# EAGLE board Sensor_ESP32_1.0 (EAGLE 9.6.2)
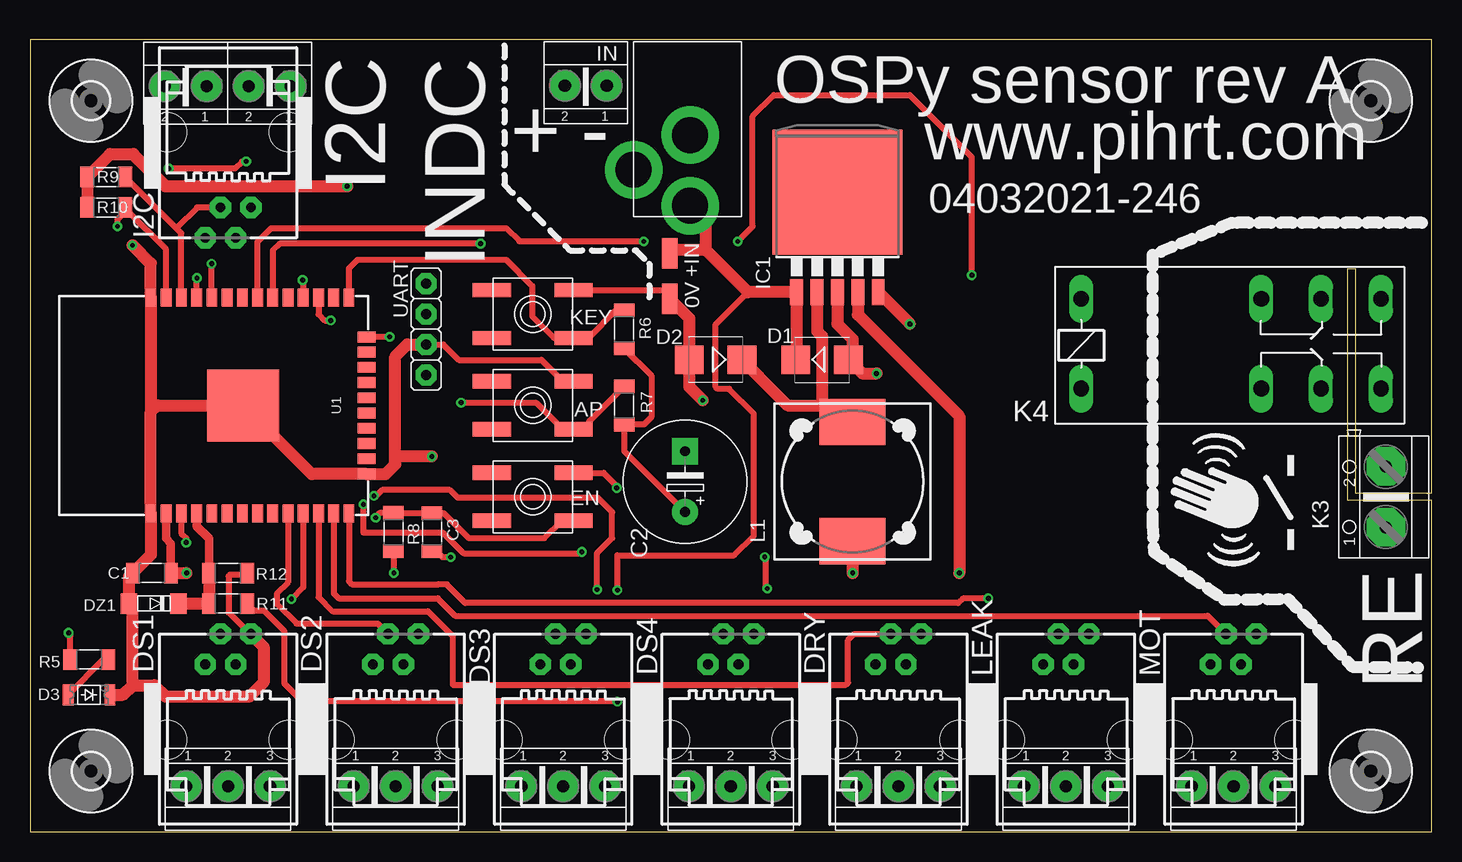
[diagram p0: board, top side]
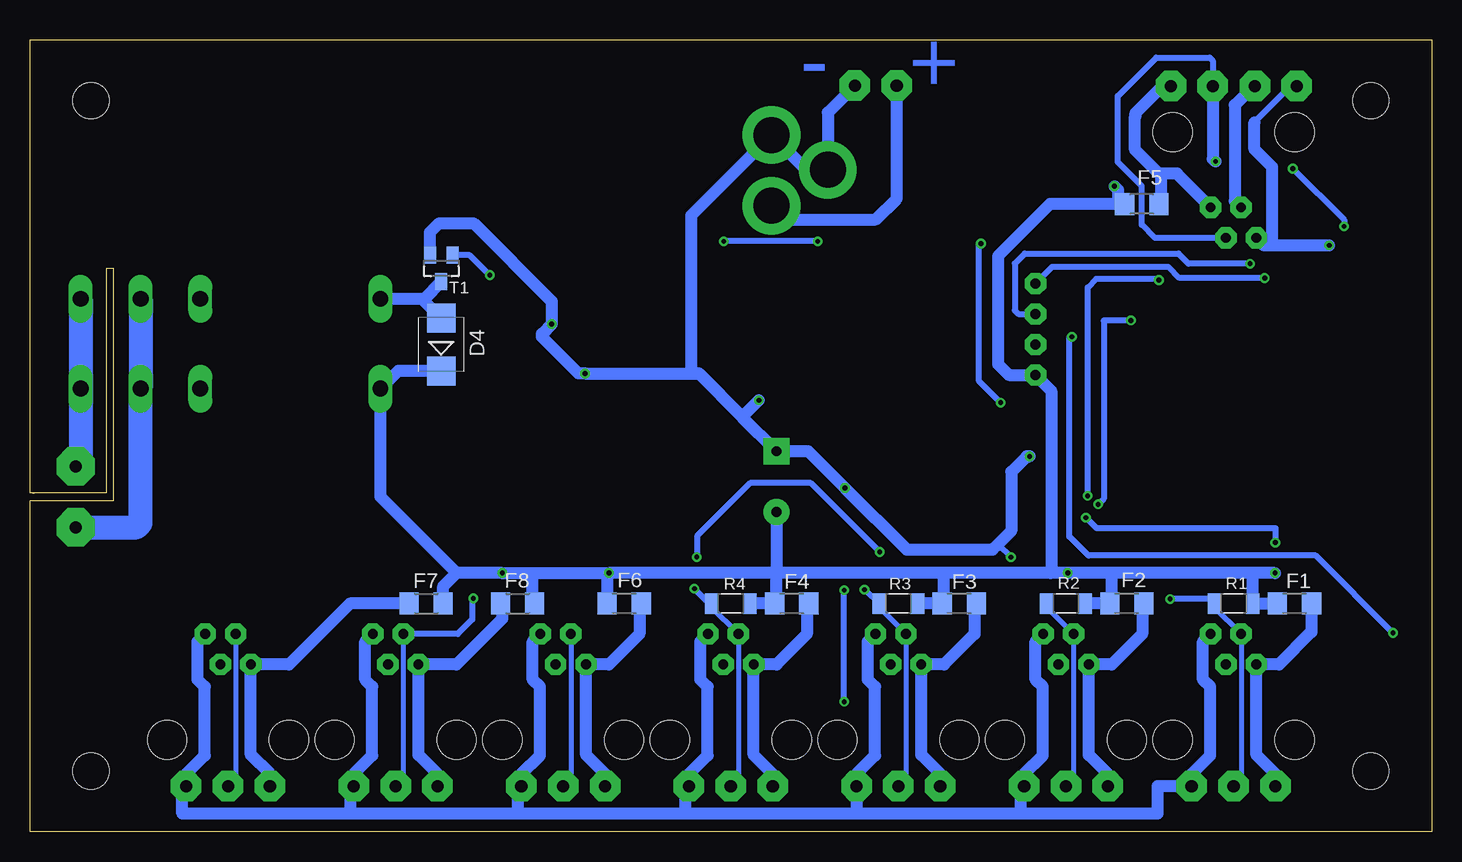
[diagram p1: board, bottom side, seen from below]

Size 116.84 x 66.04 mm. Coordinates in mm from the lower left corner, seen from the top.
Outline: 116.48,28.23 116.66,28.24
Outline: 0,0 116.84,0 116.84,27.62 109.86,27.62 109.86,46.99 110.49,46.99 110.49,28.26 116.84,28.26 116.84,66.04 0,66.04 0,0
Copper layers (1*16): Top 0.035mm / dielectric 1.5mm / Bottom 0.035mm
Design rules "default": minimum track width 6mil, minimum drill 0.35mm, track to track 6mil, track to pad 6mil, pad to pad 6mil, via to via 6mil, smd to smd 6mil, copper to edge 40mil, drill to drill 6mil, minimum pad ring 10mil, minimum via ring 8mil, stop-mask expansion 4mil, vias tented up to drill 0mil, thermal gap 10mil

## Footprints (pad centres in the part's own frame; a part is rotated, then mirrored left to right if it is on the bottom)
SMD1,27-2,54 = smd 1.27 x 2.54: 1 0,0
PJ-102A = drill 3 pad 4.8: RING 0.1,-3.39; RING_SW -4.6,-6.29; TIP 0.1,-9.29
EVQ-Q2 = smd 3.2 x 1.2: A -3.4,-2; A' 3.4,-2; B -3.4,2; B' 3.4,2
1206 = smd 1.143 x 1.702: 1 -1.587,0; 2 1.587,0
C-EL_5 = drill 0.813 pad 2.184: C+ -2.54,0 | drill 0.813 pad 2.184 square: C- 2.54,0
SMB = smd 2.4 x 2.4: A 2.2,0; C -2.2,0
P1206 = smd 0.914 x 1.778: A -1.905,0; K 1.587,0
WEBP_6_1 = drill 0.813 pad 1.778 octagon: 1 -1.905,6.35; 2 -0.635,8.89; 3 0.635,6.35; 4 1.905,8.89 | hole 3.251: -5.08,0.064; 5.08,0.064
ARK550/3 = drill 1.016 pad 2.54 octagon: 1 -3.493,0; 2 0,0; 3 3.493,0
SOD-80 = smd 1.397 x 1.702: A 1.905,0; K -2.223,0
R1206 = smd 1.6 x 1.803: 1 -1.422,0; 2 1.422,0
3,0 = hole 3: 0,0
TO263-5 = smd 1.067 x 2.159: 1 -3.404,-5.791; 2 -1.702,-5.791; 3 0,-5.791; 4 1.702,-5.791; 5 3.404,-5.791 | smd 10.8 x 10.41: 6 0,2.54
ARK550/2 = drill 1.016 pad 2.54 octagon: 1 0,0; 2 3.493,0
ARK500/2 = drill 1 pad 3.2 octagon: 1 -2.54,0; 2 2.54,0
G2R2 = drill 1.321 long: 1 -2.54,-3.683; 2 -2.54,3.81; O1 12.471,3.81; O2 12.471,-3.683; P1 17.45,3.81; P2 17.45,-3.683; S1 22.454,3.81; S2 22.454,-3.683
DR125 = smd 3.85 x 5.5: 1 -4.975,0; 2 4.975,0
SOT23 = smd 1 x 1.4: 1 -0.95,-1.1; 2 0.95,-1.1; 3 0,1.1
ESP-WROOM-32 = smd 0.9 x 1.5: 1 7.7,9; 2 6.43,9; 3 5.16,9; 4 3.89,9; 5 2.62,9; 6 1.35,9; 7 0.08,9; 8 -1.19,9; 9 -2.46,9; 10 -3.73,9; 11 -5,9; 12 -6.27,9; 13 -7.54,9; 14 -8.81,9; 25 -8.81,-9; 26 -7.54,-9; 27 -6.27,-9; 28 -5,-9; 29 -3.73,-9; 30 -2.46,-9; 31 -1.19,-9; 32 0.08,-9; 33 1.35,-9; 34 2.62,-9; 35 3.89,-9; 36 5.16,-9; 37 6.43,-9; 38 7.7,-9 | smd 1.5 x 0.9: 15 -10.3,5.715; 16 -10.3,4.445; 17 -10.3,3.175; 18 -10.3,1.905; 19 -10.3,0.635; 20 -10.3,-0.635; 21 -10.3,-1.905; 22 -10.3,-3.175; 23 -10.3,-4.445; 24 -10.3,-5.715 | smd 6 x 6: GND 0,0
S1G4_JUM = drill 0.813 pad 1.778 octagon: 1 -3.81,0; 2 -1.27,0; 3 1.27,0; 4 3.81,0

## Placement (x,y rotation side)
0V  [SMD1,27-2,54]  53.34,44.45 0 top
+DCIN  2.1MMJACKTHM  [PJ-102A]  54.93,61.5 0 top
+IN  [SMD1,27-2,54]  53.34,48.26 0 top
AP  [EVQ-Q2]  41.91,35.56 180 top
C1  100n  [1206]  10.16,21.59 0 top
C2  1000uF/10V  [C-EL_5]  54.61,29.21 90 top
C3  100n  [1206]  33.51,25 90 top
D1  SK210  [SMB]  66.04,39.37 0 top
D2  SK210  [SMB]  57.15,39.37 180 top
D3  MODE  [P1206]  5.08,11.43 0 top
D4  SK210  [SMB]  82.55,40.64 90 bottom
DRY  [WEBP_6_1]  72.39,7.62 0 top
DRYS  [ARK550/3]  72.39,3.81 0 top
DS1  [WEBP_6_1]  16.51,7.62 0 top
DS1S  [ARK550/3]  16.51,3.81 0 top
DS2  [WEBP_6_1]  30.48,7.62 0 top
DS2S  [ARK550/3]  30.48,3.81 0 top
DS3  [WEBP_6_1]  44.45,7.62 0 top
DS3S  [ARK550/3]  44.45,3.81 0 top
DS4  [WEBP_6_1]  58.42,7.62 0 top
DS4S  [ARK550/3]  58.42,3.81 0 top
DZ1  BZV55-C3V6.115  [SOD-80]  10.16,19.05 180 top
EN  [EVQ-Q2]  41.91,27.94 180 top
F1  20 mA  [R1206]  11.43,19.05 0 bottom
F2  20 mA  [R1206]  25.4,19.05 0 bottom
F3  20 mA  [R1206]  39.37,19.05 0 bottom
F4  20 mA  [R1206]  53.34,19.05 0 bottom
F5  200 mA  [R1206]  24.16,52.35 0 bottom
F6  20 mA  [R1206]  67.31,19.05 0 bottom
F7  20 mA  [R1206]  83.82,19.05 180 bottom
F8  20 mA  [R1206]  76.2,19.05 180 bottom
H1  [3,0]  5.08,5.08 0 top
H2  [3,0]  5.08,60.96 0 top
H3  [3,0]  111.76,60.96 0 top
H4  [3,0]  111.76,5.08 0 top
I2C  [WEBP_6_1]  16.51,58.42 180 top
IC1  LM2576S-3.3/NOPB  [TO263-5]  67.31,50.8 0 top
IN  [ARK550/2]  48.08,62.23 180 top
K1  [ARK550/2]  21.73,62.19 180 top
K2  [ARK550/2]  14.73,62.19 180 top
K3  RE OUT  [ARK500/2]  113.03,27.94 90 top
K4  RM84-2012-35-1003  [G2R2]  90.17,40.64 0 top
KEY  [EVQ-Q2]  41.91,43.18 180 top
L1  HPI1260-101 100uH  [DR125]  68.58,29.21 90 top
LEAK  [WEBP_6_1]  86.36,7.62 0 top
LEAKS  [ARK550/3]  86.36,3.81 0 top
MOT  [WEBP_6_1]  100.33,7.62 0 top
MOTS  [ARK550/3]  100.33,3.81 0 top
R1  4k7  [1206]  16.51,19.05 0 bottom
R2  4k7  [1206]  30.48,19.05 0 bottom
R3  4k7  [1206]  44.45,19.05 0 bottom
R4  4k7  [1206]  58.42,19.05 0 bottom
R5  330  [1206]  4.94,14.37 180 top
R6  10k  [1206]  49.53,41.91 90 top
R7  10k  [1206]  49.53,35.56 90 top
R8  10k  [1206]  30.3,25 270 top
R9  4k7  [1206]  6.35,54.61 0 top
R10  4k7  [1206]  6.35,52.07 0 top
R11  100k  [1206]  16.51,19.05 180 top
R12  10k  [1206]  16.51,21.59 180 top
T1  2N7002E  [SOT23]  82.55,46.99 180 bottom
U1  ESP-WROOM-32  [ESP-WROOM-32]  17.78,35.56 180 top
U$1  [GESTURESENSE_NOTEXT]  102.55,21.91 90 top
UART  [S1G4_JUM]  33.02,41.91 90 top

## Library data of the parts
0V +IN = wirepad
+DCIN AP EN F1-F8 KEY = adafruit
C1-C3 D3 DZ1 R1-R12 = #PaJa_31
D1 D2 D4 = diode
DRY DRYS DS1 DS1S DS2 DS2S DS3 DS3S DS4 DS4S I2C IN K1-K3 LEAK LEAKS MOT MOTS UART = #PaJa_konektory
H1-H4 = holes
IC1 = v-reg-3
K4 = relay; MF: OMRON COMPONENTS USA; MPN: G2R-2-DC6; OC_FARNELL: unknown; OC_NEWARK: 89C5317
L1 = inductors; SPICEPREFIX: L
T1 = nxp_60
U1 = esp32
U$1 = SparkFun-Aesthetics

## Nets
+3,3V: C1.2 C2.C+ D4.C F1.1 F2.1 F3.1 F4.1 F5.1 F6.1 F7.1 F8.1 IC1.4 K4.1 L1.1 R1.2 R2.2 R3.2 R4.2 R6.1 R7.1 R8.2 R9.1 R10.1 U1.2 UART.1
AD: DZ1.K R11.2 R12.2 U1.4
BOOT: KEY.B R6.2 U1.25
DRYCON: DRY.2 DRYS.2 U1.12
DS1: DS1.2 DS1S.2 R1.1 U1.11
DS2: DS2.2 DS2S.2 R2.1 U1.10
DS3: DS3.2 DS3S.2 R3.1 U1.28
DS4: DS4.2 DS4S.2 R4.1 U1.27
EN: C3.2 EN.B R8.1 U1.3
GND: 0V.1 +DCIN.RING +DCIN.RING_SW AP.A C1.1 C2.C- C3.1 D1.A D2.A D3.K DRY.4 DRYS.3 DS1.4 DS1S.3 DS2.4 DS2S.3 DS3.4 DS3S.3 DS4.4 DS4S.3 DZ1.A EN.A I2C.4 IC1.3 IC1.5 IN.1 K2.2 KEY.A LEAK.4 LEAKS.3 MOT.4 MOTS.3 R12.1 T1.2 U1.1 U1.15 U1.38 U1.GND UART.2
IN: +DCIN.TIP +IN.1 D1.C IC1.1 IN.2 R11.1
LEAK: LEAK.2 LEAKS.2 U1.14
MOTION: MOT.2 MOTS.2 U1.13
N$1: DS1.1 DS1S.1 F1.2
N$2: D2.C IC1.2 L1.2
N$3: DS2.1 DS2S.1 F2.2
N$4: F8.2 LEAK.1 LEAKS.1
N$5: DS3.1 DS3S.1 F3.2
N$6: DS4.1 DS4S.1 F4.2
N$7: F5.2 I2C.1 K1.1
N$8: D4.A K4.2 T1.3
N$9: R5.2 U1.24
N$10: K3.2 K4.S1 K4.S2
N$11: K3.1 K4.P1 K4.P2
N$12: DRY.1 DRYS.1 F6.2
N$13: F7.2 MOT.1 MOTS.1
N$18: D3.A R5.1
RELE: T1.1 U1.31
RXD: U1.35 UART.4
SCL: I2C.3 K2.1 R9.2 U1.36
SDA: I2C.2 K1.2 R10.2 U1.37
TXD: U1.34 UART.3
WIFIAP: AP.B R7.2 U1.30

## Tracks (layer width: path | path; a pad name or v marks a point on that pad's centre or on a via)
+3,3V  (via drill 0.4)
  Top 0.5: 26.44,53.84 v26.44,53.84 | R8.2 30.3,21.78 30.33,21.76 v30.33,21.59 | C2.C+ 49.53,31.75 R7.1 51.2,33.97 51.81,34.58 51.81,38.05 R6.1
  Top 0.7: U1.2 11.35,24.46 11.75,24.07 C1.2
  Top 1: R10.1 R9.1 6.68,56.52 8.61,56.52 11.3,53.84 26.44,53.84 | C1.2 13.01,21.59 13.03,21.57 v13.05,21.59 | L1.1 v68.58,21.59 | IC1.4 69.01,43.12 77.47,34.66 v77.47,21.59
  Bottom 1: F1.1 R1.2 14.92,21.59 | R2.2 F2.1 26.67,19.2 26.67,21.59 | R3.2 F3.1 40.64,19.2 40.64,21.59 | R4.2 F4.1 54.61,19.2 54.61,21.59 | 14.92,21.59 26.67,21.59 | 26.67,21.59 v30.33,21.59 31.76,21.59 | 31.76,21.59 40.64,21.59 | 40.64,21.59 54.61,21.59 | 54.61,21.59 v68.58,21.59 | v68.58,21.59 68.73,21.44 F6.1 | F7.1 82.4,20.47 81.28,21.59 | 81.28,21.59 v77.47,21.59 74.93,21.59 | 74.93,21.59 v68.58,21.59 | F8.1 74.93,19.2 74.93,21.59 | D4.C 86.15,38.44 K4.1 87.63,27.94 81.28,21.59 | v26.44,53.84 26.13,53.54 26.13,52.9 F5.1 31.81,52.35 36.15,48.01 36.15,39.01 35.24,38.1 UART.1 31.7,36.78 31.7,21.66 31.76,21.59 | v13.05,21.59 14.92,21.59 | C2.C+ 54.61,21.59
AD
  Top 0.7: U1.4 13.91,26.54 13.91,25.48 14.92,24.47 R12.2
  Top 1: DZ1.K R11.2 R12.2
BOOT
  Top 0.5: R6.2 48.87,43.5 46.55,41.18 KEY.B 43.67,41.18 41.87,42.98 41.87,45.53 39.7,47.7 27.29,47.7 26.59,47 U1.25
DRYCON
  Top 0.5: U1.12 24.05,19.58 25.23,18.41 33.17,18.41 35.24,16.34 35.24,12.27 68.02,12.27 68.2,12.45 68.2,16.01 68.7,16.51 DRY.2
  Bottom 0.4: DRY.2 71.75,4.45 DRYS.2
DS1  (via drill 0.4)
  Top 0.5: U1.11 22.78,20.41 v21.79,19.42
  Bottom 0.4: DS1S.2 15.88,4.45 DS1.2 18.1,18.73 R1.1
  Bottom 0.5: v21.79,19.42 21.75,19.46 18.51,19.46 R1.1
DS2
  Top 0.5: U1.10 21.51,20.81 20.57,19.88 20.57,19.01 22.21,17.37 28.99,17.37 DS2.2
  Bottom 0.4: DS2S.2 29.84,4.45 DS2.2 32.07,18.73 R2.1
DS3  (via drill 0.4)
  Top 0.5: v47.28,20.2 47.28,23.27 48.52,24.5 48.52,26.68 47.35,27.85 35.67,27.85 35.01,28.5 29.36,28.5 28.78,27.92 v28.67,28.02 | v28.67,28.02 | v22.73,46.02 22.78,45.97 U1.28
  Bottom 0.4: DS3S.2 43.81,4.45 DS3.2 46.04,18.73 R3.1
  Bottom 0.5: R3.1 47.19,20.2 v47.28,20.2 | v28.67,28.02 28.67,45.4 27.95,46.12 22.8,46.12 22.8,46.09 v22.73,46.02
DS4  (via drill 0.4)
  Top 0.5: U1.27 24.05,43.16 24.57,42.65 v25.06,42.65 | v27.79,27.32 27.79,24.97 34.41,24.97 36.14,23.24 46.01,23.24 v46.01,23.35 | v61.26,22.92 61.31,22.86 61.31,20.39 61.43,20.28 v61.46,20.28
  Bottom 0.4: DS4S.2 57.78,4.45 DS4.2 60.01,18.73 R4.1
  Bottom 0.5: v25.06,42.65 27.3,42.65 27.34,42.6 27.34,27.77 v27.79,27.32 | v46.01,23.35 51.75,29.09 56.8,29.09 61.23,24.67 61.23,22.95 v61.26,22.92 | v61.46,20.28 60.23,19.05 R4.1
EN  (via drill 0.4)
  Top 0.5: v28.82,26.2 28.82,26.28 29.13,26.59 R8.1 C3.2 34.48,26.59 36.57,24.49 42.89,24.49 44.34,25.94 EN.B | v13.02,24.13 13.02,24.51 12.62,24.91 U1.3
  Bottom 0.5: v28.82,26.2 27.94,25.33 13.02,25.33 v13.02,24.13
GND  (via drill 0.4)
  Top 0.5: R12.1 17.95,21.44 16.67,21.44 16.55,21.32 16.55,18.29 18.34,16.51 DS1.4 | KEY.A 53.24,45.18 53.33,45.27 53.34,45.25 0V.1 | UART.2 34.46,40.64 35.74,39.36 42.63,39.36 44.43,37.56 AP.A | EN.A 47.81,29.94 48.9,28.85 v48.9,28.69 | C3.1 33.95,23.41 34.41,22.95 34.38,22.91 v35.07,22.91
  Top 1: D3.K 7.74,11.43 8.54,12.23 | 8.54,12.23 8.54,18.76 DZ1.A 8.26,21.27 C1.1 10.08,23.1 U1.1 10.08,35.03 | 10.08,35.03 10.61,35.56 U1.GND 23.5,29.84 U1.15 29.63,29.84 30.44,30.65 30.44,31.44 | 10.08,35.03 U1.38 10.08,47.41 8.59,48.9 v8.54,48.9 | 8.54,12.23 10.36,12.23 11.29,11.3 18.3,11.3 19.52,12.51 19.52,15.37 18.38,16.51 18.34,16.51 | IC1.3 67.31,42.36 68.58,41.09 68.58,39.71 D1.A 69.38,38.23 v70.57,38.23 | IC1.5 73.35,42.37 v73.35,42.35 | v56.08,35.99 54.95,37.12 D2.A 54.95,42.84 0V.1 | v56.08,35.99 | 30.44,31.44 30.44,39.62 31.46,40.64 UART.2 | v33.5,31.31 30.56,31.31 30.44,31.44
  Bottom 0.5: K2.2 11.77,62.19 14.78,59.18 | v35.07,22.91 | 36.15,23.99 v35.07,22.91
  Bottom 1: DS1.4 19.05,15.88 19.05,12.7 18.45,12.1 18.45,6.38 20,4.83 DS1S.3 22.86,3.81 22.86,1.52 34.29,1.52 | DS2.4 33.02,15.88 33.02,12.7 32.42,12.1 32.42,6.38 33.97,4.83 DS2S.3 34.29,3.49 34.29,1.52 | DS3.4 46.99,15.88 46.99,12.7 46.39,12.1 46.39,6.38 47.94,4.83 DS3S.3 47.94,1.83 48.26,1.52 | DS4.4 60.96,15.88 60.96,12.7 60.36,12.1 60.36,6.38 61.91,4.83 DS4S.3 62.23,3.49 62.23,1.52 | DRY.4 74.93,15.88 74.93,12.7 74.33,12.1 74.33,6.38 75.88,4.83 DRYS.3 76.2,3.49 76.2,1.52 | LEAK.4 88.9,15.88 88.9,12.7 88.3,12.1 88.3,6.38 89.85,4.83 LEAKS.3 90.17,3.49 90.17,1.52 | MOT.4 102.87,15.88 102.87,12.7 102.27,12.1 102.27,6.38 103.82,4.83 MOTS.3 104.14,3.49 104.14,1.52 90.17,1.52 | 34.29,1.52 48.26,1.52 | 48.26,1.52 62.23,1.52 | 62.23,1.52 76.2,1.52 | 76.2,1.52 90.17,1.52 | 14.78,59.18 14.78,56.91 13.32,55.45 13.32,49.02 13.2,48.9 | v8.54,48.9 13.2,48.9 | 13.2,48.9 13.98,48.9 I2C.4 | IN.1 50.33,59.98 +DCIN.RING_SW 52.13,55.21 +DCIN.RING 61.71,51.42 61.71,38.23 | 61.71,38.23 v70.57,38.23 71.11,38.23 74.17,41.28 74.17,41.53 v73.35,42.35 73.35,44.24 79.88,50.76 82.74,50.76 83.5,50 T1.2 | 61.71,38.23 61.09,38.23 57.47,34.61 | 57.47,34.61 C2.C- 51.97,31.75 v48.9,28.69 43.75,23.54 36.6,23.54 36.15,23.99 35.03,25.11 35.03,30.03 33.75,31.31 v33.5,31.31 | v56.08,35.99 57.47,34.61 | 57.47,34.61
IN  (via drill 0.4)
  Top 0.5: R11.1 18.67,18.48 18.67,18.47 19.47,18.47 21.19,16.75 21.19,12.38 22.66,10.91 48.89,10.91 48.9,10.93 v48.97,10.86 | v48.97,20.16 48.97,23.06 58.7,23.06 60.34,24.69 60.34,34.87 58.27,36.94 57.32,36.94 57.16,37.1 57.16,42.32 59.84,45.01
  Top 1: D1.C 63.91,39.44 IC1.1 59.84,45.01 56.3,48.55 | 56.3,48.55 56.3,50.94 +DCIN.TIP | +IN.1 53.63,48.55 56.3,48.55
  Bottom 0.5: v48.97,10.86 v48.97,20.16 | v48.97,20.16 | v48.97,20.16
  Bottom 1: +DCIN.TIP 53.88,51.06 46.34,51.06 44.59,52.81 IN.2
LEAK  (via drill 0.4)
  Top 0.5: U1.14 26.59,20.89 26.83,20.66 34.05,20.66 34.05,20.65 34.73,20.65 36.29,19.09 77.37,19.09 77.75,19.47 v79.88,19.47 v79.89,19.47
  Bottom 0.4: LEAK.2 85.72,4.45 LEAKS.2
  Bottom 0.5: v79.89,19.47 79.97,19.39 79.97,17.72 81.18,16.5 LEAK.2
MOTION
  Top 0.5: U1.13 25.32,19.88 25.71,19.49 33.99,19.49 35.45,18.02 98.18,18.02 MOT.2
  Bottom 0.4: MOT.2 99.69,4.45 MOTS.2
N$1
  Bottom 1: DS1S.1 13.02,4.83 14.61,6.42 DS1.1 12.7,13.97 10.01,16.66 F1.2
N$2
  Top 1: IC1.2 65.61,41.74 66.04,41.31 66.04,35.56 | 66.04,35.56 67.42,34.19 L1.2 | D2.C 60.7,38.02 63.16,35.56 66.04,35.56
N$3
  Bottom 1: DS2S.1 26.99,4.83 28.57,6.42 DS2.1 26.67,13.97 24.13,16.51 24.13,18.9 F2.2
N$4
  Bottom 1: LEAKS.1 82.87,4.83 84.45,6.42 LEAK.1 81.28,13.97 77.47,17.78 77.47,18.9 F8.2
N$5
  Bottom 1: DS3S.1 40.96,4.83 42.55,6.42 DS3.1 40.64,13.97 38.1,16.51 38.1,18.9 F3.2
N$6
  Bottom 1: DS4S.1 54.93,4.83 56.52,6.42 DS4.1 54.61,13.97 52.07,16.51 52.07,18.9 F4.2
N$7
  Bottom 1: I2C.1 21.23,54.89 22.54,54.89 | 22.54,54.89 22.74,54.89 24.73,56.88 24.73,59.66 24.69,59.7 24.69,59.94 22.44,62.19 K1.1 | F5.2 22.54,52.55 22.54,54.89
N$8
  Bottom 1: D4.A 84.16,44.45 | 84.16,44.45 K4.2 | T1.3 83.99,44.45 84.16,44.45
N$9  (via drill 0.4)
  Top 0.5: R5.2 3.35,16.36 3.36,16.38 3.36,16.45 v3.22,16.59 | v29.98,41.29 29.97,41.27 U1.24
  Bottom 0.5: v3.22,16.59 9.66,23.04 28.6,23.04 30.2,24.63 30.2,41.23 30.14,41.29 v29.98,41.29
N$10
  Bottom 2: K4.S1 K4.S2 112.62,30.89 K3.2
N$11
  Bottom 2: K3.1 107.95,25.4 107.62,25.73 K4.P2 K4.P1
N$12
  Bottom 1: DRYS.1 68.9,4.83 70.48,6.42 DRY.1 68.58,13.97 66.04,16.51 66.04,18.9 F6.2
N$13
  Bottom 1: MOTS.1 96.84,4.83 98.42,6.42 MOT.1 95.25,13.97 90.17,19.05 F7.2
N$18
  Top 0.5: D3.A 6.12,14.37 R5.1
RELE  (via drill 0.4)
  Top 0.5: U1.31 18.97,49.21 20.1,50.34 39.7,50.34 40.79,49.25 v51.17,49.25 | v59.01,49.25 60.25,50.49 60.25,59.68 62.02,61.44 73.34,61.44 78.48,56.3 78.48,46.43 v78.51,46.43
  Bottom 0.5: v51.17,49.25 v59.01,49.25 | v78.51,46.43 80.17,48.09 T1.1
RXD  (via drill 0.4)
  Top 0.5: U1.35 13.89,45.92 13.91,45.94 v13.91,46.19
  Bottom 0.5: v13.91,46.19 21.01,46.19 21.95,47.12 31.62,47.12 UART.4
SCL
  Top 0.5: U1.36 12.62,49.93 12.2,50.35 | 12.2,50.35 R9.2 | I2C.3 13.92,52.07 12.2,50.35
  Bottom 1: I2C.3 16.41,52.61 16.41,60.6 14.83,62.19 K2.1
SDA  (via drill 0.4)
  Top 0.5: U1.37 11.35,48.58 8.07,51.86 | R10.2 7.94,51.99 8.07,51.86 | v18.02,55.9 17.67,55.9 17.07,55.31 11.61,55.31 11.56,55.36 v11.56,55.31 | v7.29,50.49 7.29,51.09 8.07,51.86
  Bottom 0.5: I2C.2 23.05,49.53 24.16,50.63 24.16,53.85 26.16,55.85 26.16,61.36 22.95,64.57 18.49,64.57 18.24,64.32 K1.2 | v11.56,55.31 7.29,51.04 v7.29,50.49
  Bottom 1: K1.2 18.24,56.13 v18.02,55.9 | v18.02,55.9
TXD  (via drill 0.4)
  Top 0.5: U1.34 15.16,47.18 15.24,47.26 15.14,47.36 v15.14,47.38
  Bottom 0.5: v15.14,47.38 20.26,47.38 21.11,48.23 33.91,48.23 34.74,47.4 34.74,43.47 34.45,43.18 UART.3
WIFIAP  (via drill 0.4)
  Top 0.5: R7.2 46.61,34.23 46.61,33.72 46.58,33.69 45.44,33.69 AP.B 44.42,33.56 42.23,35.75 35.93,35.75 v35.93,35.8 | v37.57,49.05 20.79,49.05 20.24,48.5 U1.30
  Bottom 0.5: v35.93,35.8 37.72,37.58 37.72,49.05 v37.57,49.05

## Text on the board
Bottom: + | -
tNames: I2C | INDC | OSPy sensor rev A | + | - | www.pihrt.com | 04032021-246 | - | - | RE